# Altium PCB ROS_CAR.PcbDoc (part 9 of 13)
Units mil, origin at the board's own origin, x right, y up, seen from the top; angles counter-clockwise.
Board outline 3937.01 x 3937.01 mil, 2 copper layers (Top Layer, Bottom Layer); 201 components, 155 nets, 998 pads, 0 vias.
Unrouted connection lines stored in the file: 3.
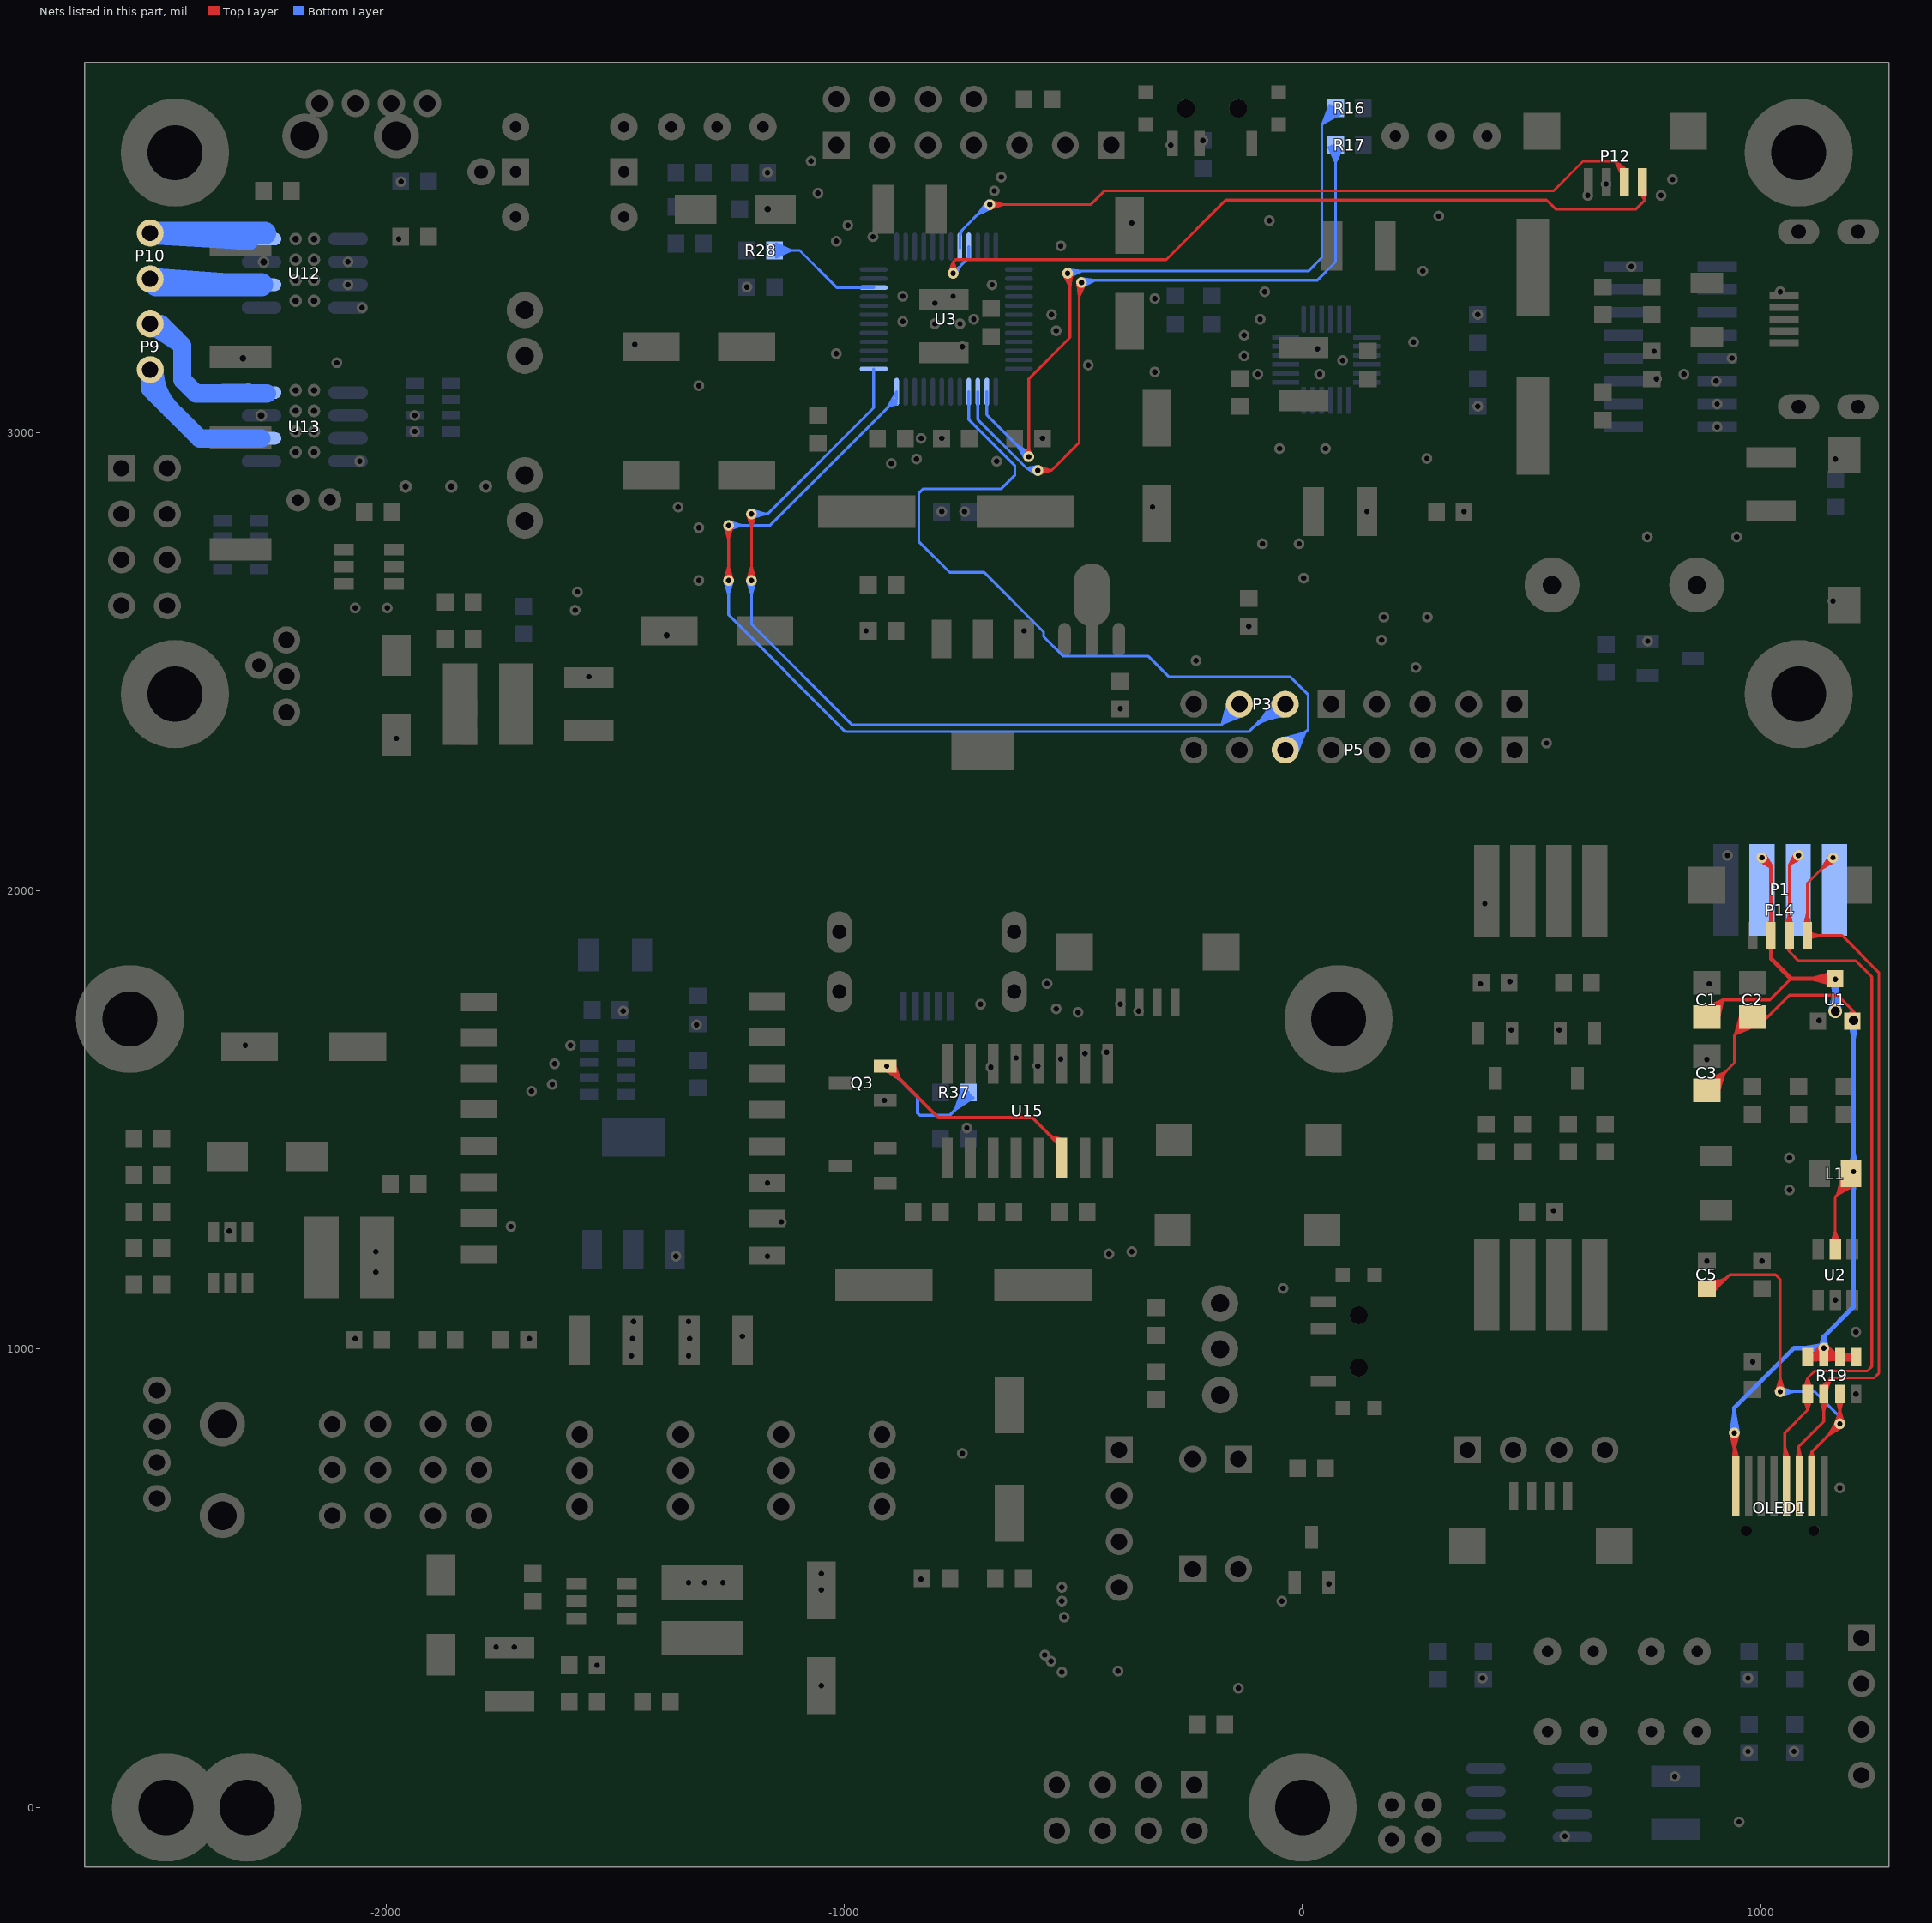
[diagram p9: the nets of this part, all layers, seen from the top]

## Nets (pads, with @x,y where several pads share a name; then routed paths per layer and width w, separated by ;. In a path a pad name is that pad's centre, name@x,y a point inside that pad or via, vN(x,y) a via of type N, cw(c..) or ccw(c..) an arc to the next point about the centre after c; other vN are vias at no path point) (continued)
OLEDVCC_3.3: C2.1 C3.1 L1.1 OLED1.1 pad.1@942.52,817.09 pad.1@1137.52,1002.09 pad.1@1202.52,1387.09 pad.1@1202.52,1717.09 R19.1 R19.2 R19.3 R19.4 U1.2 U2.5 | length 7362
  Top Layer w6: C3.1@873.36,1583.09 920.84,1603 ; C3.1@876.05,1577.61 920.84,1603 ; C3.1@879.34,1572.53 920.84,1603 ; C3.1@882.52,1564.69 942.52,1624.69 942.52,1684.69 C2.1@982.52,1724.69 1015.12,1724.69 ; C3.1@883.18,1567.9 920.84,1603 ; C3.1@886.46,1564.69 920.84,1603 ; C3.1@886.46,1581.28 ccw(c886.46,1611.82) C3.1@908.06,1590.22 ; C3.1@886.46,1587.28 ccw(c886.46,1632.31) 918.3,1600.47 ; C3.1@890.01,1561.77 920.84,1603 ; C3.1@895.02,1558.46 920.84,1603 ; C3.1@897.05,1564.69 cw(c932.12,1564.69) C3.1@907.32,1589.49 ; C3.1@900.43,1555.74 920.84,1603 ; C3.1@903.05,1564.69 cw(c952.6,1564.69) 917.56,1599.73 ; C3.1@906.17,1553.66 920.84,1603 ; C3.1@909.05,1564.69 cw(c973.09,1564.69) 927.8,1609.97 ; 944.49,1686.65 ccw(c915.25,1715.89) C2.1@956.21,1721.58 ; 946.74,1688.9 cw(c978.58,1657.06) C2.1@978.58,1702.09 ; 953.02,1695.18 ccw(c930.23,1717.97) C2.1@962.15,1722.4 ; C2.1@956.98,1699.15 cw(c978.58,1677.55) C2.1@978.58,1708.09 ; C2.1@958.87,1735.72 944.2,1686.37 ; C2.1@961.54,1703.71 ccw(c945.2,1720.05) C2.1@968.09,1723.23 ; C2.1@964.61,1733.63 944.2,1686.37 ; C2.1@970.01,1730.91 944.2,1686.37 ; C2.1@975.03,1727.6 944.2,1686.37 ; C2.1@978.58,1724.69 944.2,1686.37 ; C2.1@981.86,1721.47 944.2,1686.37 ; C2.1@985.7,1716.84 944.2,1686.37 ; C2.1@986.46,1724.69 1015.12,1724.69 ; C2.1@986.82,1720.11 1015.12,1724.69 ; C2.1@986.82,1729.26 1015.12,1724.69 ; C2.1@988.41,1714.28 1015.12,1724.69 ; C2.1@988.41,1735.09 1015.12,1724.69 ; C2.1@988.98,1711.76 944.2,1686.37 ; C2.1@991.26,1708.8 1015.12,1724.69 ; C2.1@991.26,1740.57 1015.12,1724.69 ; C2.1@991.68,1706.28 944.2,1686.37 ; C2.1@995.36,1703.92 1015.12,1724.69 ; C2.1@995.36,1745.45 1015.12,1724.69 ; C2.1@1008.42,1719.41 cw(c1015.12,1717.8) 1015.12,1724.69 ; C2.1@1008.42,1729.96 ccw(c1015.12,1731.57) 1015.12,1724.69 ; R19.1@1102.11,973.29 R19.2@1132.17,976.29 ; R19.1@1102.11,990.89 R19.2@1132.17,987.89 ; R19.1@1103.82,973.37 1132.33,982.09 R19.1@1103.82,990.8 ; R19.1@1105.45,973.78 R19.2@1132.17,987.89 ; R19.1@1105.45,990.39 R19.2@1132.17,976.29 ; R19.1@1108.75,975.86 cw(c1123.79,960.82) 1123.79,982.09 cw(c1123.79,1003.36) R19.1@1108.75,988.32 ; R19.2@1129.04,999.68 R19.2@1136.64,989.03 ; R19.2@1129.13,999.4 R19.2@1137.05,989.07 ; R19.2@1129.44,998.57 R19.2@1138.39,989.03 ; R19.2@1129.75,997.92 R19.2@1139.67,988.75 ; pad.1@1131.52,1008.54 R19.1@1109.52,982.09 ; R19.2@1132.37,994.94 R19.3@1164.64,977.11 ; R19.2@1132.57,977.14 ccw(c1120.62,965.19) 1120.62,982.09 ccw(c1120.62,998.99) R19.2@1132.57,987.04 ; R19.2@1133.36,994.32 R19.3@1165.52,982.09 ; R19.2@1134.56,993.79 R19.3@1165.47,987.45 ; R19.2@1136.64,975.14 R19.1@1109.52,982.09 ; R19.2@1137.05,975.1 R19.3@1165.47,976.72 ; R19.2@1138.39,975.14 R19.3@1165.52,982.09 ; R19.2@1139.67,975.43 R19.3@1165.47,987.45 ; R19.2@1141.68,994.32 R19.1@1109.52,982.09 ; R19.2@1142.47,977.14 cw(c1154.42,965.19) 1154.42,982.09 cw(c1154.42,998.99) R19.2@1142.47,987.04 ; pad.1@1142.66,1009.24 R19.3@1165.47,987.45 ; pad.1@1143.52,1008.54 R19.3@1165.52,982.09 ; pad.1@1144.22,1007.81 R19.3@1164.64,977.11 ; R19.2@1145.6,998.57 R19.2@1136.64,989.03 ; R19.2@1145.7,998.81 R19.2@1137.05,989.07 ; R19.2@1146,999.68 R19.2@1138.39,989.03 ; R19.2@1146.2,1000.58 R19.2@1139.67,988.75 ; U2.5@1152.85,1227.62 1162.52,1256.86 ; U2.5@1155.59,1232.99 ccw(c1138.87,1249.71) 1162.52,1249.71 ccw(c1186.17,1249.71) U2.5@1169.45,1232.99 ; U2.5@1158.73,1226.3 1162.52,1256.86 ; U2.5@1162.52,1226.06 1162.52,1256.86 ; U2.5@1162.52,1227.09 1162.52,1332.09 L1.1@1196.97,1366.54 ; U2.5@1166.31,1226.3 1162.52,1256.86 ; R19.3@1167.57,977.14 ccw(c1155.62,965.19) 1155.62,982.09 ccw(c1155.62,998.99) R19.3@1167.57,987.04 ; R19.3@1171.64,975.14 1144.52,982.09 R19.3@1171.64,989.03 ; R19.3@1171.68,975.14 R19.4@1200.14,975.23 ; R19.3@1171.68,989.04 R19.4@1200.15,988.94 ; U2.5@1172.19,1227.62 1162.52,1256.86 ; R19.3@1173.39,975.14 1200.52,982.09 R19.3@1173.39,989.03 ; R19.3@1175.03,975.55 R19.4@1200.15,988.94 ; R19.3@1175.03,988.62 R19.4@1200.14,975.23 ; 1175.04,1344.61 ccw(c1153.09,1366.56) L1.1@1183.44,1373.08 ; R19.3@1177.47,977.14 cw(c1189.42,965.19) 1189.42,982.09 cw(c1189.42,998.99) R19.3@1177.47,987.04 ; L1.1@1177.58,1371.82 cw(c1140.25,1363.81) 1167.25,1336.81 ; L1.1@1179.07,1384.54 1167.26,1336.83 ; 1179.24,1348.81 cw(c1196.97,1331.08) L1.1@1196.97,1356.15 ; 1182.84,1352.4 ccw(c1165.92,1369.32) L1.1@1189.31,1374.34 ; L1.1@1184.88,1382.71 1167.26,1336.83 ; U1.2@1185.99,1721.55 1199.92,1739.68 ; U1.2@1191.36,1718.47 1199.92,1739.68 ; U1.2@1193.82,1730.2 ccw(c1189.51,1739.68) 1199.92,1739.68 ; L1.1@1194.57,1390.89 L1.1@1184.38,1359.39 ; L1.1@1195.16,1391.93 L1.1@1180.32,1361.35 ; L1.1@1195.98,1392.99 L1.1@1190.37,1380.21 ; U1.2@1196.29,1723.32 ccw(c1187.52,1732.09) U1.2@1199.92,1732.09 ; L1.1@1196.97,1375.98 1167.26,1336.83 ; U1.2@1199.92,1715.83 1199.92,1739.68 ; U1.2@1199.92,1716.81 1199.92,1739.68 ; R19.4@1201.29,975.86 ccw(c1186.25,960.82) 1186.25,982.09 ccw(c1186.25,1003.36) R19.4@1201.29,988.32 ; L1.1@1202.81,1370.77 1167.26,1336.83 ; L1.1@1204.22,1378.44 L1.1@1190.37,1380.21 ; U1.2@1206.02,1730.2 cw(c1210.34,1739.68) 1199.92,1739.68 ; R19.4@1206.22,973.37 1177.71,982.09 R19.4@1206.22,990.8 ; L1.1@1206.7,1366.15 1167.26,1336.83 ; R19.4@1207.52,982.09 R19.1@1102.52,982.09 ; U1.2@1207.75,1724.18 cw(c1219.19,1739.68) 1199.92,1739.68 ; L1.1@1208.39,1380.52 L1.1@1180.32,1361.35 ; U1.2@1208.48,1718.47 1199.92,1739.68 ; L1.1@1209.18,1381.32 L1.1@1184.38,1359.39 ; L1.1@1210.03,1361.05 1167.26,1336.83 ; U1.2@1213.86,1721.55 1199.92,1739.68 ; 1015.12,1724.69 1062.52,1772.09 1167.52,1772.09 1199.92,1739.68 ; R19.1@1102.52,982.09 R19.2@1132.17,987.89 ; R19.1@1102.52,982.09 R19.2@1132.17,976.29 ; R19.1@1109.52,982.09 pad.1@1137.52,1002.09 ; R19.1@1109.52,982.09 R19.2@1136.64,989.03 ; R19.2@1136.64,989.03 pad.1@1137.52,1002.09 ; R19.2@1137.05,989.07 pad.1@1137.52,1002.09 ; R19.2@1137.05,989.07 R19.3@1165.47,987.45 ; pad.1@1137.52,1002.09 R19.2@1139.67,988.75 ; pad.1@1137.52,1002.09 R19.3@1164.64,977.11 ; pad.1@1137.52,1002.09 R19.2@1138.39,989.03 ; pad.1@1137.52,1002.09 R19.3@1165.52,982.09 ; pad.1@1137.52,1002.09 R19.3@1165.47,987.45 ; R19.2@1138.39,989.03 R19.3@1165.52,982.09 ; R19.2@1139.67,988.75 R19.3@1165.47,976.72 ; R19.3@1165.47,976.72 R19.2@1137.52,982.09 R19.3@1165.47,987.45 ; 1167.26,1336.83 L1.1@1190.37,1380.21 ; L1.1@1180.32,1361.35 pad.1@1202.52,1387.09 ; L1.1@1184.38,1359.39 pad.1@1202.52,1387.09 ; L1.1@1190.37,1380.21 pad.1@1202.52,1387.09 ; U1.2@1193.74,1717.79 1199.92,1739.68 ; U1.2@1193.74,1717.79 1199.92,1739.68 ; U1.2@1193.74,1717.79 1199.92,1739.68 ; U1.2@1193.74,1717.79 1199.92,1739.68 ; U1.2@1193.74,1717.79 1199.92,1739.68 ; 1199.92,1739.68 pad.1@1202.52,1717.09 ; 1199.92,1739.68 U1.2@1210.91,1719.77 ; 1199.92,1739.68 pad.1@1202.52,1717.09 ; 1199.92,1739.68 U1.2@1210.91,1719.77 ; 1199.92,1739.68 pad.1@1202.52,1717.09 ; 1199.92,1739.68 U1.2@1210.91,1719.77 ; 1199.92,1739.68 pad.1@1202.52,1717.09 ; 1199.92,1739.68 U1.2@1210.91,1719.77 ; 1199.92,1739.68 pad.1@1202.52,1717.09 ; 1199.92,1739.68 U1.2@1210.91,1719.77 ; R19.4@1200.14,975.23 R19.3@1172.52,982.09 R19.4@1200.15,988.94
  Top Layer w7: pad.1@934.28,816.03 942.52,784.28 ; pad.1@936.64,811.21 cw(c922.46,797.02) 942.52,797.02 cw(c962.58,797.02) pad.1@948.4,811.21 ; OLED1.1@941.69,759.95 942.52,789.06 ; 942.52,779.27 ccw(c965.18,779.27) OLED1.1@949.16,763.25 ; OLED1.1@946.06,760.16 942.52,789.06 ; OLED1.1@947.52,717.09 942.52,722.09 pad.1@942.52,817.09 942.52,784.28 ; OLED1.1@950.35,761.01 942.52,789.06 ; pad.1@950.76,816.03 942.52,784.28
  Bottom Layer w10: pad.1@935.73,817.64 942.52,858.9 ; pad.1@937.7,821.9 ccw(c926.08,833.53) 942.52,833.53 ccw(c958.96,833.53) pad.1@947.34,821.9 ; pad.1@942.52,807.09 942.52,872.09 1072.52,1002.09 pad.1@1137.52,1002.09 1137.52,1027.09 ; pad.1@942.52,817.09 942.52,858.9 ; pad.1@949.31,817.64 942.52,858.9 ; pad.1@1130.77,1003.01 1137.52,1027.09 ; pad.1@1132.7,997.27 ccw(c1121.08,985.64) 1121.08,1002.09 ccw(c1121.08,1018.53) 1132.7,1006.9 ccw(c1121.08,1018.53) 1137.52,1018.53 ccw(c1153.96,1018.53) pad.1@1142.34,1006.9 ; pad.1@1136.96,995.3 1095.71,1002.09 pad.1@1136.96,1008.88 ; pad.1@1137.52,992.09 1137.52,1027.09 ; pad.1@1144.27,1003.01 1137.52,1027.09 ; pad.1@1195.73,1386.53 1202.52,1345.28 pad.1@1209.31,1386.53 ; pad.1@1195.73,1387.64 1202.52,1428.9 pad.1@1209.31,1387.64 ; pad.1@1195.73,1716.53 1202.52,1675.28 pad.1@1209.31,1716.53 ; pad.1@1197.7,1382.27 cw(c1186.08,1370.64) 1202.52,1370.64 cw(c1218.96,1370.64) pad.1@1207.34,1382.27 ; pad.1@1197.7,1391.9 ccw(c1186.08,1403.53) 1202.52,1403.53 ccw(c1218.96,1403.53) pad.1@1207.34,1391.9 ; pad.1@1197.7,1712.27 cw(c1186.08,1700.64) 1202.52,1700.64 cw(c1218.96,1700.64) pad.1@1207.34,1712.27 ; pad.1@1202.52,1717.09 1202.52,1092.09 1137.52,1027.09
OLEDVCC_5: C1.1 P1.3 P14.3 pad.1@1002.52,2072.09 pad.1@1162.52,1737.09 pad.1@1162.52,1807.09 U1.1 | length 2466.1
  Top Layer w6: C1.1@872.91,1742.76 917.52,1762.09 ; C1.1@875.69,1737.31 917.52,1762.09 ; C1.1@879.1,1732.3 917.52,1762.09 ; C1.1@882.52,1724.69 882.52,1727.09 917.52,1762.09 ; C1.1@883.07,1727.78 917.52,1762.09 ; C1.1@886.46,1724.69 917.52,1762.09 ; C1.1@886.46,1741.28 ccw(c886.46,1766.03) C1.1@903.96,1748.52 ; C1.1@886.46,1747.28 ccw(c886.46,1786.51) 914.2,1758.77 ; C1.1@890.12,1721.92 917.52,1762.09 ; C1.1@895.29,1718.85 917.52,1762.09 ; C1.1@896.76,1727.15 cw(c917.22,1732.03) C1.1@902.35,1746.91 ; C1.1@900.84,1716.42 917.52,1762.09 ; C1.1@902.59,1728.54 cw(c929.47,1734.96) 909.93,1754.5 ; C1.1@906.71,1714.68 917.52,1762.09 ; C1.1@908.43,1729.93 cw(c941.72,1737.88) 917.52,1762.09 ; 1066.26,1808.35 1020,1762.09 917.52,1762.09
  Top Layer w10: pad.1@998.31,2066.73 1022.83,2051.77 ; pad.1@1002.52,2065.28 cw(c1002.52,2048.83) 1014.15,2060.46 cw(c1025.77,2072.09) pad.1@1009.33,2072.09 ; pad.1@1002.52,2072.09 1022.83,2051.77 ; pad.1@1007.87,2076.3 1022.83,2051.77 ; P14.3@1019.41,1878.51 cw(c1011.14,1870.24) 1022.83,1870.24 cw(c1034.53,1870.24) P14.3@1026.26,1878.51 ; P14.3@1019.41,1925.67 ccw(c1011.14,1933.93) 1022.83,1933.93 ccw(c1034.53,1933.93) P14.3@1026.26,1925.67 ; P14.3@1022.83,1881.93 1022.83,1851.77 ; P14.3@1022.83,1922.24 1022.83,1962.09 ; 1143.03,1808.35 cw(c1143.03,1787.6) U1.1@1157.7,1802.27 ; U1.1@1149.12,1808.35 ccw(c1149.12,1820.49) U1.1@1157.7,1811.9 ; U1.1@1153.53,1799.35 ccw(c1131.82,1777.65) 1131.82,1808.35 ccw(c1131.82,1839.05) U1.1@1153.53,1817.34 ; U1.1@1155.76,1807.93 U1.1@1160.82,1820.95 ; U1.1@1160.82,1795.74 1114.8,1808.35 ; U1.1@1161.85,1800.31 1114.8,1808.35 ; U1.1@1161.91,1800.3 1117.01,1807.74 ; U1.1@1162.11,1813.89 1117.01,1807.74 ; U1.1@1162.21,1813.89 1114.8,1808.35 ; U1.1@1168.87,1809.54 U1.1@1160.82,1820.95 ; 1022.83,1851.77 1066.26,1808.35 U1.1@1162.52,1808.35 1114.8,1808.35 ; 1022.83,1851.77 1022.83,2051.77 ; 1114.8,1808.35 pad.1@1162.52,1807.09 ; 1114.8,1808.35 U1.1@1160.82,1820.95 ; 1117.01,1807.74 pad.1@1162.52,1807.09 ; 1120.67,1808.35 pad.1@1162.52,1807.09 ; 1120.67,1808.35 1162.17,1813.89 1120.66,1808.35 ; 1120.67,1808.35 1161.76,1800.32 1120.66,1808.35 ; 1120.66,1808.35 pad.1@1162.52,1807.09 ; U1.1@1160.82,1820.95 pad.1@1162.52,1807.09
  Bottom Layer w10: pad.1@1152.58,1738.2 1162.52,1782.09 pad.1@1172.46,1738.2 ; pad.1@1155.45,1744.16 ccw(c1138.38,1761.23) 1162.52,1761.23 ccw(c1186.66,1761.23) pad.1@1169.59,1744.16 ; pad.1@1155.73,1806.53 1162.52,1765.28 pad.1@1169.31,1806.53 ; pad.1@1157.7,1802.27 cw(c1146.08,1790.64) 1162.52,1790.64 cw(c1178.96,1790.64) pad.1@1167.34,1802.27 ; pad.1@1162.52,1737.09 pad.1@1162.52,1807.09
ORES: C5.2 OLED1.7 pad.1@1042.52,907.09 pad.1@1172.52,837.09 R19.6 | length 2183.3
  Top Layer w6: C5.2@879.09,1146.43 921.72,1151.29 ; C5.2@880.19,1140.47 921.72,1151.29 ; C5.2@882.11,1134.77 921.72,1151.29 ; C5.2@882.52,1131.77 902.2,1131.77 ; C5.2@883.09,1129.11 ccw(c887.48,1157.08) 907.49,1137.06 ; C5.2@884.02,1135.04 ccw(c889.74,1171.5) 915.84,1145.4 ; C5.2@884.95,1140.97 ccw(c892,1185.92) 924.18,1153.74 ; C5.2@885.12,1128.89 921.72,1151.29 ; C5.2@885.88,1146.89 ccw(c894.26,1200.34) 932.52,1162.08 ; C5.2@888.61,1123.99 921.72,1151.29 ; C5.2@892.79,1119.6 921.72,1151.29 ; C5.2@898.51,1128.75 cw(c902.2,1128) 902.2,1131.77 ; C5.2@898.51,1134.8 ccw(c902.2,1135.54) 902.2,1131.77 ; pad.1@1033.81,908.39 1042.52,936.9 pad.1@1051.23,908.39 ; pad.1@1036.29,913.32 ccw(c1021.25,928.36) 1042.52,928.36 ccw(c1063.79,928.36) pad.1@1048.75,913.32 ; pad.1@1042.52,907.09 1042.52,1152.09 1032.52,1162.09 932.52,1162.09 ; OLED1.7@1106.6,760.91 1111.42,775.98 ; OLED1.7@1107.97,763.6 ccw(c1099.65,771.92) 1111.42,771.92 ccw(c1123.18,771.92) OLED1.7@1114.86,763.6 ; OLED1.7@1111.42,702.09 1111.42,775.98 ; OLED1.7@1111.42,760.16 1111.42,775.98 ; OLED1.7@1116.23,760.91 1111.42,775.98 ; pad.1@1163.71,837.09 cw(c1142.44,837.09) 1157.48,822.04 cw(c1172.52,807) pad.1@1172.52,828.27 ; pad.1@1163.8,838.39 1172.52,866.9 pad.1@1181.23,838.39 ; pad.1@1165.55,842.47 1147.98,812.55 ; R19.6@1165.57,891.21 1172.52,864.09 ; pad.1@1166.29,843.32 ccw(c1151.25,858.36) 1172.52,858.36 ccw(c1193.79,858.36) pad.1@1178.75,843.32 ; R19.6@1167.57,887.14 cw(c1155.62,875.19) 1172.52,875.19 cw(c1189.42,875.19) R19.6@1177.47,887.14 ; R19.6@1172.52,892.09 1172.52,864.09 ; R19.6@1172.52,902.09 pad.1@1172.52,837.09 ; pad.1@1177.91,830.11 1147.98,812.55 ; R19.6@1179.46,891.21 1172.52,864.09 ; C5.2@883.5,1131.77 902.2,1131.77 ; C5.2@883.5,1131.77 921.72,1151.29 ; C5.2@883.5,1131.77 902.2,1131.77 ; 902.2,1131.77 883.8,1128.48 902.2,1131.77 ; 902.2,1131.77 883.8,1135.07 902.2,1131.77 ; 902.2,1131.77 885.82,1122.76 902.2,1131.77 ; 902.2,1131.77 885.82,1140.79 902.2,1131.77 ; 902.2,1131.77 889.77,1117.81 902.2,1131.77 ; 902.2,1131.77 889.77,1145.74 902.2,1131.77 ; 902.2,1131.77 932.52,1162.09 ; 1111.42,775.98 pad.1@1172.52,837.09 ; 1147.98,812.55 pad.1@1172.52,837.09
  Bottom Layer w6: pad.1@1042.52,907.09 1117.52,907.09 1172.52,852.09 ; pad.1@1043.82,898.37 1072.33,907.09 pad.1@1043.82,915.8 ; pad.1@1048.75,900.86 cw(c1063.79,885.82) 1063.79,907.09 cw(c1063.79,928.36) pad.1@1048.75,913.32 ; pad.1@1164.1,839.67 1172.52,852.09 ; pad.1@1168.23,844.78 ccw(c1164.15,852.09) 1172.52,852.09 ; pad.1@1172.52,837.09 1172.52,852.09 ; pad.1@1176.81,844.78 cw(c1180.88,852.09) 1172.52,852.09 ; pad.1@1180.94,839.67 1172.52,852.09
OSCL: OLED1.6 P1.1 P14.1 pad.1@1157.52,2072.09 R19.7 | length 2257.4
  Top Layer w6: OLED1.6@1078.99,760.36 1082.52,786.03 ; OLED1.6@1080.41,763.6 ccw(c1075.32,768.69) 1082.52,768.69 ; OLED1.6@1082.52,742.09 1082.52,787.09 1137.52,842.09 1137.52,922.09 1152.52,937.09 ; 1082.52,775.16 ccw(c1098.86,775.16) OLED1.6@1087.3,763.6 ; OLED1.6@1083.86,760.16 1082.52,786.03 ; OLED1.6@1088.68,760.87 1082.52,786.03 ; P14.1@1094.78,1923.08 1101.57,1950.09 ; P14.1@1096.74,1927.08 ccw(c1085.06,1938.76) 1101.57,1938.76 ccw(c1118.09,1938.76) P14.1@1106.41,1927.08 ; P14.1@1101.57,1922.24 1101.57,1950.09 ; P14.1@1102.42,1895.3 1129.42,1902.09 P14.1@1102.42,1908.88 ; P14.1@1106.41,1897.25 cw(c1118.09,1885.57) 1118.09,1902.09 cw(c1118.09,1918.61) P14.1@1106.41,1906.93 ; P14.1@1108.37,1923.08 1101.57,1950.09 ; R19.7@1130.57,891.21 1137.52,864.09 ; R19.7@1131.99,916.38 1152.52,937.09 ; R19.7@1132.57,887.14 cw(c1120.62,875.19) 1137.52,875.19 cw(c1154.42,875.19) R19.7@1142.47,887.14 ; R19.7@1137.52,892.09 1137.52,864.09 ; R19.7@1137.52,912.09 1152.52,937.09 ; R19.7@1138.51,912.23 cw(c1157.67,914.88) 1143.99,928.56 ; R19.7@1143.91,909.23 1152.52,937.09 ; R19.7@1144.46,891.21 1137.52,864.09 ; R19.7@1144.45,913.05 cw(c1172.64,916.96) 1152.52,937.09 ; pad.1@1148.71,2072.09 cw(c1127.44,2072.09) 1142.48,2057.05 cw(c1157.52,2042) pad.1@1157.52,2063.28 ; pad.1@1150.55,2077.48 1132.98,2047.55 ; pad.1@1162.91,2065.12 1132.98,2047.55 ; 1132.98,2047.55 pad.1@1157.52,2072.09 1101.57,2016.14 P14.1@1101.57,1902.09 1177.52,1902.09 1257.52,1822.09 1257.52,947.09 1247.52,937.09 1152.52,937.09
OSDA: OLED1.5 P1.2 P14.2 pad.1@1082.52,2077.09 R19.8 | length 2246.9
  Top Layer w6: OLED1.5@1051.43,759.91 1052.52,786.11 ; OLED1.5@1052.52,752.09 1052.52,817.09 1102.52,867.09 ; 1052.52,781.05 ccw(c1077.19,781.05) OLED1.5@1059.75,763.6 ; P14.2@1055.41,1923.08 1062.2,1950.09 ; P14.2@1055.55,1880.32 1062.2,1867.4 ; OLED1.5@1056.3,760.16 1052.52,786.11 ; P14.2@1057.37,1927.08 ccw(c1045.69,1938.76) 1062.2,1938.76 ccw(c1078.72,1938.76) P14.2@1067.04,1927.08 ; P14.2@1057.85,1876.65 cw(c1050.21,1867.4) 1062.2,1867.4 ; OLED1.5@1061.04,761.3 1052.52,786.11 ; P14.2@1062.2,1881.93 1062.2,1867.4 ; P14.2@1062.2,1922.24 1062.2,1950.09 ; P14.2@1066.56,1876.65 ccw(c1074.2,1867.4) 1062.2,1867.4 ; P14.2@1068.85,1880.32 1062.2,1867.4 ; P14.2@1069,1923.08 1062.2,1950.09 ; pad.1@1073.71,2077.09 cw(c1052.44,2077.09) 1067.48,2062.05 cw(c1082.52,2047) pad.1@1082.52,2068.28 ; pad.1@1075.41,2082.29 1062.2,2056.77 ; pad.1@1087.72,2069.97 1062.2,2056.77 ; R19.8@1093.83,892.45 1102.52,867.09 ; R19.8@1093.83,911.72 1102.52,937.09 ; R19.8@1096.29,887.67 cw(c1081.25,872.63) 1102.52,872.63 cw(c1123.79,872.63) R19.8@1108.75,887.67 ; R19.8@1096.29,916.51 ccw(c1081.25,931.55) 1102.52,931.55 ccw(c1123.79,931.55) R19.8@1108.75,916.51 ; R19.8@1102.52,893.9 1102.52,867.09 ; R19.8@1102.52,910.28 1102.52,937.09 ; R19.8@1111.21,892.45 1102.52,867.09 ; R19.8@1111.21,911.72 1102.52,937.09 ; 1062.2,1867.4 1082.52,1847.09 1207.52,1847.09 1242.52,1812.09 1242.52,962.09 1232.52,952.09 1117.52,952.09 1102.52,937.09 ; 1062.2,1867.4 1062.2,2056.77 ; 1062.2,2056.77 pad.1@1082.52,2077.09 1062.2,2056.77 ; 1102.52,867.09 1102.52,937.09
OUT2_1: P9.2 U13.8 | length 621.3
  Bottom Layer w40: P9.2@-2515,3227.56 cw(c-2515,3149.24) -2459.62,3204.62 ; U13.8@-2301.5,3087.09 -2415,3085 ; U13.8@-2260,3085 -2415,3085 ; -2445,3190 P9.2@-2515,3237.09 -2492.09,3237.09 -2445,3190 ; -2445,3190 -2445,3115 -2415,3085
OUT2_2: P9.1 U13.6 | length 617.4
  Bottom Layer w40: P9.1@-2505.47,3137.09 ccw(c-2380.86,3137.09) -2468.98,3048.98 ; U13.6@-2301.5,2987.09 -2407.09,2987.09 ; U13.6@-2271.97,2987.09 -2407.09,2987.09 ; -2515,3095 P9.1@-2515,3137.09 ; -2515,3095 P9.1@-2515,3137.09 ; -2515,3095 P9.1@-2515,3137.09 ; -2515,3095 -2407.09,2987.09
OUT3_1: P10.2 U12.8 | length 823.3
  Bottom Layer w50: -2335.5,3424.75 P10.2@-2515,3435 ; -2335.47,3435 P10.2@-2515,3435 ; U12.8@-2301.5,3422.09 -2466.38,3435 P10.2@-2515,3435 ; U12.8@-2265,3435 P10.2@-2515,3435
OUT3_2: P10.1 U12.6 | length 872.2
  Bottom Layer w50: P10.1@-2511.8,3338.2 ccw(c-2472.89,3377.11) -2472.89,3322.09 ; -2333.45,3322.09 P10.1@-2515,3335 ; -2331.97,3322.09 P10.1@-2515,3335 ; U12.6@-2301.5,3322.09 -2465.28,3322.09 P10.1@-2515,3335 ; U12.6@-2271.97,3322.09 -2502.09,3322.09 P10.1@-2515,3335
PA2: P3.2 pad.1@-1252.48,2677.09 pad.1@-1252.48,2797.09 U3.12 | length 3349.3
  Top Layer w6: pad.1@-1261.19,2678.39 -1252.48,2706.9 pad.1@-1243.77,2678.39 ; pad.1@-1261.19,2795.78 -1252.48,2767.28 pad.1@-1243.77,2795.78 ; pad.1@-1258.71,2683.32 ccw(c-1273.75,2698.36) -1252.48,2698.36 ccw(c-1231.21,2698.36) pad.1@-1246.25,2683.32 ; pad.1@-1258.71,2790.86 cw(c-1273.75,2775.82) -1252.48,2775.82 cw(c-1231.21,2775.82) pad.1@-1246.25,2790.86 ; pad.1@-1252.48,2677.09 pad.1@-1252.48,2797.09
  Bottom Layer w6: pad.1@-1261.19,2675.78 -1252.48,2647.28 pad.1@-1243.77,2675.78 ; pad.1@-1258.71,2670.86 cw(c-1273.75,2655.82) -1252.48,2655.82 cw(c-1231.21,2655.82) pad.1@-1246.25,2670.86 ; pad.1@-1252.48,2677.09 -1252.48,2602.09 -997.48,2347.09 -117.48,2347.09 -57.48,2407.09 P3.2@-37.48,2407.09 -87.26,2377.31 ; pad.1@-1252.48,2797.09 -1162.48,2797.09 -885.75,3073.82 U3.12@-885.75,3088.62 -906.12,3053.45 ; pad.1@-1251.18,2788.37 -1222.67,2797.09 pad.1@-1251.18,2805.8 ; pad.1@-1246.25,2790.86 cw(c-1231.21,2775.82) -1231.21,2797.09 cw(c-1231.21,2818.36) pad.1@-1246.25,2803.32 ; -907.44,3052.13 cw(c-885.75,3030.43) U3.12@-885.75,3061.11 ; -897.2,3062.37 cw(c-885.75,3050.92) U3.12@-885.75,3067.11 ; U3.12@-886.96,3072.61 cw(c-885.75,3071.4) U3.12@-885.75,3073.11 ; -116.91,2347.66 cw(c-37.48,2268.23) P3.2@-37.48,2380.56 ; -106.66,2357.9 cw(c-37.48,2288.72) P3.2@-37.48,2386.56 ; -96.42,2368.14 cw(c-37.48,2309.2) P3.2@-37.48,2392.56 ; -86.18,2378.39 cw(c-37.48,2329.69) P3.2@-37.48,2398.56 ; -75.94,2388.63 cw(c-37.48,2350.17) P3.2@-37.48,2404.56 ; -68.62,2395.94 ccw(c-79.77,2407.09) P3.2@-64.01,2407.09 ; P3.2@-55.94,2426.13 -87.26,2377.31 ; P3.2@-50.97,2422.56 -87.26,2377.31 ; P3.2@-46.44,2418.52 -87.26,2377.31 ; P3.2@-42.38,2414.06 -87.26,2377.31 ; P3.2@-33.65,2399.47 -87.26,2377.31 ; P3.2@-31.64,2393.78 -87.26,2377.31 ; P3.2@-30.23,2387.88 -87.26,2377.31 ; P3.2@-29.43,2381.81 -87.26,2377.31
PA3: P3.3 pad.1@-1202.48,2677.09 pad.1@-1202.48,2822.09 U3.13 | length 2987.6
  Top Layer w6: pad.1@-1211.19,2678.39 -1202.48,2706.9 pad.1@-1193.77,2678.39 ; pad.1@-1211.19,2820.78 -1202.48,2792.28 ; pad.1@-1208.71,2683.32 ccw(c-1223.75,2698.36) -1202.48,2698.36 ccw(c-1181.21,2698.36) pad.1@-1196.25,2683.32 ; pad.1@-1208.71,2815.86 cw(c-1223.75,2800.82) -1202.48,2800.82 cw(c-1181.21,2800.82) pad.1@-1196.25,2815.86 ; pad.1@-1202.48,2677.09 pad.1@-1202.48,2822.09 -1202.48,2792.28 ; pad.1@-1193.77,2820.78 -1202.48,2792.28
  Bottom Layer w6: pad.1@-1211.19,2675.78 -1202.48,2647.28 pad.1@-1193.77,2675.78 ; pad.1@-1208.71,2670.86 cw(c-1223.75,2655.82) -1202.48,2655.82 cw(c-1181.21,2655.82) pad.1@-1196.25,2670.86 ; pad.1@-1202.48,2677.09 -1202.48,2582.09 -982.48,2362.09 -177.48,2362.09 P3.3@-127.48,2412.09 ; pad.1@-1202.48,2822.09 -1167.48,2822.09 -935.94,3053.62 U3.13@-935.94,3138.82 -935.94,3115.9 ; pad.1@-1201.18,2813.37 -1172.67,2822.09 pad.1@-1201.18,2830.8 ; pad.1@-1196.25,2815.86 cw(c-1181.21,2800.82) -1181.21,2822.09 cw(c-1181.21,2843.36) pad.1@-1196.25,2828.32 ; -174.98,2364.59 ccw(c-204.48,2394.09) P3.3@-163.52,2402.03 ; -174.23,2365.34 cw(c-137.48,2328.59) P3.3@-137.48,2380.56 ; -167,2372.57 ccw(c-191.11,2396.68) P3.3@-157.63,2403.18 ; -163.99,2375.58 cw(c-137.48,2349.07) P3.3@-137.48,2386.56 ; P3.3@-160.87,2419.6 -175.61,2363.96 ; -159.01,2380.55 ccw(c-177.74,2399.28) P3.3@-151.74,2404.32 ; P3.3@-155.04,2417.72 -175.61,2363.96 ; P3.3@-149.49,2415.26 -175.61,2363.96 ; P3.3@-144.27,2412.25 -175.61,2363.96 ; P3.3@-137.48,2407.09 -175.61,2363.96 ; P3.3@-131.53,2400.98 -175.61,2363.96 ; P3.3@-127.9,2396.17 -175.61,2363.96 ; P3.3@-124.77,2390.97 -175.61,2363.96 ; P3.3@-122.19,2385.41 -175.61,2363.96
PA11: P12.2 pad.1@-682.48,3497.09 U3.32 | length 1933.2
  Top Layer w6: pad.1@-682.48,3497.09 -462.48,3497.09 -432.48,3527.09 547.52,3527.09 612.2,3591.77 682.84,3591.77 ; pad.1@-681.18,3488.37 -652.67,3497.09 pad.1@-681.18,3505.8 ; pad.1@-676.25,3490.86 cw(c-661.21,3475.82) -661.21,3497.09 cw(c-661.21,3518.36) pad.1@-676.25,3503.32 ; 686.88,3587.73 cw(c666.4,3567.24) P12.2@695.36,3567.24 ; P12.2@696.4,3563.62 682.84,3591.77 ; 697.12,3577.49 cw(c686.88,3567.24) P12.2@701.36,3567.24 ; P12.2@702.21,3567.24 682.84,3591.77 ; P12.2@702.52,3572.09 682.84,3591.77 ; P12.2@707.08,3572.05 682.84,3591.77
  Bottom Layer w6: U3.32@-747.48,3402.09 -747.48,3437.09 pad.1@-692.48,3492.09 ; U3.32@-746.03,3431.14 cw(c-728.18,3431.14) -740.8,3443.76 ; -706.06,3478.51 cw(c-682.48,3454.93) pad.1@-682.48,3488.28 ; -695.81,3488.75 cw(c-682.48,3475.42) pad.1@-682.48,3494.28 ; -693.99,3490.58 ccw(c-700.49,3497.09) pad.1@-691.29,3497.09 ; pad.1@-688.86,3503.16 -709.57,3474.99 ; pad.1@-682.48,3497.09 -709.57,3474.99 ; pad.1@-677.82,3489.61 -709.57,3474.99
PA12: P12.1 pad.1@-762.48,3347.09 U3.33 | length 1926
  Top Layer w6: pad.1@-771.15,3348.64 -762.48,3372.09 ; pad.1@-768.71,3353.32 ccw(c-783.75,3368.36) -762.48,3368.36 ccw(c-741.21,3368.36) pad.1@-756.25,3353.32 ; pad.1@-762.48,3347.09 -762.48,3372.09 ; pad.1@-753.81,3348.64 -762.48,3372.09 ; P12.1@735.44,3523.91 747.52,3507.09 ; P12.1@738.51,3520.81 cw(c731.19,3506.22) 747.52,3506.22 ; P12.1@741.2,3526.18 cw(c736.06,3515.94) 747.52,3515.94 ; P12.1@741.58,3526.93 747.52,3507.09 ; P12.1@747.52,3537.09 747.52,3507.09 ; P12.1@748.36,3527.78 747.52,3507.09 ; -762.48,3372.09 -757.48,3377.09 -297.48,3377.09 -167.48,3507.09 532.52,3507.09 552.52,3487.09 727.52,3487.09 747.52,3507.09
  Bottom Layer w6: pad.1@-762.48,3347.09 -728.27,3381.3 U3.33@-728.27,3405.55 ; pad.1@-762.48,3355.9 ccw(c-762.48,3377.17) -747.44,3362.13 ccw(c-732.4,3347.09) pad.1@-753.67,3347.09 ; -733.83,3375.73 cw(c-728.27,3370.17) U3.33@-728.27,3378.04
PC13: pad.1@-512.48,3347.09 pad.1@-597.48,2947.09 R16.1 U3.2 | length 2385
  Top Layer w6: pad.1@-603.71,2953.32 ccw(c-618.75,2968.36) -597.48,2968.36 ccw(c-576.21,2968.36) pad.1@-591.25,2953.32 ; pad.1@-597.48,2947.09 -597.48,3117.09 -507.48,3207.09 pad.1@-507.48,3347.09 ; pad.1@-520.89,3344.45 -507.48,3316.42 ; pad.1@-518.71,3340.86 cw(c-545.82,3313.74) -507.48,3313.74 ; pad.1@-514.47,3345.1 cw(c-531.34,3328.23) -507.48,3328.23 ; pad.1@-512.48,3347.09 -507.48,3316.42 ; pad.1@-503.67,3347.26 -507.48,3316.42
  Bottom Layer w6: -688.9,3040.11 U3.2@-688.9,3063.03 ; U3.2@-688.9,3088.62 -688.9,3038.5 pad.1@-592.48,2942.09 ; pad.1@-606.29,2947.09 ccw(c-627.56,2947.09) -612.52,2962.13 ccw(c-597.48,2977.17) pad.1@-597.48,2955.9 ; pad.1@-604.45,2941.7 -622.02,2971.63 ; pad.1@-597.48,2947.09 -622.02,2971.63 ; pad.1@-592.09,2954.06 -622.02,2971.63 ; pad.1@-512.65,3355.9 -481.7,3352.09 ; pad.1@-512.48,3347.09 -481.7,3352.09 ; pad.1@-512.48,3352.09 12.52,3352.09 42.52,3382.09 42.52,3672.09 72.2,3701.77 R16.1@72.2,3707.09 ; pad.1@-510.49,3345.1 cw(c-493.62,3328.23) -493.62,3352.09 ; pad.1@-509.85,3338.68 -481.7,3352.09 ; pad.1@-506.25,3340.86 cw(c-479.14,3313.74) -479.14,3352.09 ; 44.69,3674.25 ccw(c15.1,3703.84) R16.1@56.91,3705.5 ; 53.47,3683.03 cw(c72.2,3664.3) R16.1@72.2,3690.8 ; 54.38,3683.95 ccw(c33.75,3704.58) R16.1@62.9,3705.73 ; R16.1@59.02,3713.88 44.26,3673.83 ; R16.1@64.55,3711.39 44.26,3673.83 ; R16.1@69.62,3708.17 44.26,3673.83 ; R16.1@72.2,3706.1 44.26,3673.83 ; R16.1@74.62,3703.84 44.26,3673.83 ; R16.1@78.53,3699.28 44.26,3673.83 ; R16.1@81.79,3694.17 44.26,3673.83
PC14: pad.1@-482.48,3327.09 pad.1@-577.48,2917.09 R17.1 U3.3 | length 2383.5
  Top Layer w6: pad.1@-577.48,2917.09 -547.48,2917.09 -487.48,2977.09 pad.1@-487.48,3327.09 ; pad.1@-576.18,2908.37 -547.67,2917.09 pad.1@-576.18,2925.8 ; pad.1@-571.25,2910.86 cw(c-556.21,2895.82) -556.21,2917.09 cw(c-556.21,2938.36) pad.1@-571.25,2923.32 ; pad.1@-491.29,3327.26 -487.48,3296.33 ; -487.48,3293.74 cw(c-449.14,3293.74) pad.1@-476.25,3320.86 ; -487.48,3308.23 cw(c-463.62,3308.23) pad.1@-480.49,3325.1 ; pad.1@-482.48,3327.09 -487.48,3296.33 ; pad.1@-474.07,3324.46 -487.48,3296.33
  Bottom Layer w6: -708.58,3040.11 U3.3@-708.58,3063.03 ; U3.3@-708.58,3088.62 -708.58,3028.19 -602.48,2922.09 ; -591.62,2922.09 cw(c-591.62,2908.2) pad.1@-579.86,2915.59 ; pad.1@-587.48,2922.09 -602.48,2922.09 ; pad.1@-584.94,2912.4 ccw(c-602.48,2901.37) -602.48,2922.09 ; pad.1@-580.68,2908.88 -602.48,2922.09 ; pad.1@-577.48,2917.09 -602.48,2922.09 ; pad.1@-577.27,2925.9 -602.48,2922.09 ; pad.1@-487.48,3327.09 -482.48,3332.09 32.52,3332.09 72.2,3371.77 R17.1@72.2,3627.09 ; pad.1@-482.65,3335.9 -451.7,3332.09 ; pad.1@-482.48,3327.09 -451.7,3332.09 ; pad.1@-480.49,3325.1 cw(c-463.62,3308.23) -463.62,3332.09 ; pad.1@-479.85,3318.68 -451.7,3332.09 ; pad.1@-476.25,3320.86 cw(c-449.14,3293.74) -449.14,3332.09 ; R17.1@57.24,3622.88 72.2,3589.8 ; R17.1@61.38,3615.28 cw(c35.25,3589.15) 72.2,3589.15 cw(c109.16,3589.15) R17.1@83.03,3615.28 ; R17.1@62.97,3624.91 72.2,3589.8 ; R17.1@65.62,3619.52 cw(c49.74,3603.63) 72.2,3603.63 cw(c94.67,3603.63) R17.1@78.79,3619.52 ; R17.1@68.9,3625.95 72.2,3589.8 ; R17.1@72.2,3626.1 72.2,3589.8 ; R17.1@75.51,3625.95 72.2,3589.8 ; R17.1@81.44,3624.91 72.2,3589.8 ; R17.1@87.17,3622.88 72.2,3589.8
PC15: P5.6 U3.4 | length 2424.8
  Bottom Layer w6: -728.27,3040.11 U3.4@-728.27,3063.03 ; U3.4@-728.27,3088.62 -728.27,3027.87 -627.48,2927.09 -627.48,2907.09 -657.48,2877.09 -827.48,2877.09 -837.48,2867.09 -837.48,2762.48 -770,2695 -695,2695 -565,2565 -565,2554.61 -522.48,2512.09 -337.48,2512.09 -292.48,2467.09 -27.48,2467.09 12.52,2427.09 12.52,2352.09 ; P5.6@-50.03,2330.46 5.82,2345.39 ; P5.6@-48.14,2324.63 5.82,2345.39 ; P5.6@-45.66,2319.09 5.82,2345.39 ; P5.6@-42.64,2313.87 5.82,2345.39 ; P5.6@-37.48,2307.09 5.82,2345.39 ; P5.6@-36.66,2321.59 ccw(c-34.44,2361.12) -6.44,2333.13 ; P5.6@-36.33,2327.58 ccw(c-33.43,2379.07) 3.04,2342.6 ; P5.6@-35.99,2333.57 ccw(c-32.42,2397.02) 12.52,2352.08 ; P5.6@-31.37,2301.13 5.82,2345.39 ; P5.6@-27.48,2312.09 12.52,2352.09 ; P5.6@-26.56,2297.5 5.82,2345.39 ; P5.6@-21.37,2294.37 5.82,2345.39 ; P5.6@-16.95,2307.09 cw(c20.53,2307.09) -5.97,2333.59 ; P5.6@-15.82,2291.78 5.82,2345.39 ; P5.6@-10.95,2307.09 cw(c41.02,2307.09) 4.27,2343.84
RST: pad.1@-907.5,1617.5 Q3.2 R37.1 U15.14 | length 8560
  Top Layer w7: Q3.2@-910.79,1617.4 -907.4,1617.4 -795,1505 -590,1505 U15.14@-525,1440 ; Q3.2@-907.5,1609.19 cw(c-907.5,1589.12) -893.31,1603.31 cw(c-879.12,1617.5) Q3.2@-899.19,1617.5 ; -554.78,1469.78 ccw(c-525,1499.56) U15.14@-525,1457.45 ; -542.83,1457.83 ccw(c-525,1475.66) U15.14@-525,1450.44 ; U15.14@-530.38,1442.8 -549.38,1464.38 ; U15.14@-525,1449.13 -549.38,1464.38 ; U15.14@-521.66,1456.74 -549.38,1464.38 ; Q3.2@-912.71,1611.03 -880.38,1590.33 ; Q3.2@-912.71,1611.03 -880.38,1590.33 ; Q3.2@-912.71,1611.03 -880.38,1590.33 ; Q3.2@-912.71,1611.03 -880.38,1590.33 ; Q3.2@-912.71,1611.03 -880.38,1590.33 ; Q3.2@-912.71,1611.03 -880.38,1590.33 ; Q3.2@-912.71,1611.03 -880.38,1590.33 ; Q3.2@-912.71,1611.03 -880.38,1590.33 ; Q3.2@-912.71,1611.03 -880.38,1590.33 ; Q3.2@-912.71,1611.03 -880.38,1590.33 ; Q3.2@-912.71,1611.03 -880.38,1590.33 ; Q3.2@-912.71,1611.03 -880.38,1590.33 ; Q3.2@-912.71,1611.03 -880.38,1590.33 ; Q3.2@-912.71,1611.03 -880.38,1590.33 ; Q3.2@-912.71,1611.03 -880.38,1590.33 ; Q3.2@-912.71,1611.03 -880.38,1590.33 ; Q3.2@-912.71,1611.03 -880.38,1590.33 ; Q3.2@-912.71,1611.03 -880.38,1590.33 ; Q3.2@-912.71,1611.03 -880.38,1590.33 ; Q3.2@-912.71,1611.03 -880.38,1590.33 ; Q3.2@-912.71,1611.03 -880.38,1590.33 ; Q3.2@-912.7,1611.02 -880.29,1590.33 ; Q3.2@-912.7,1611.02 -880.29,1590.33 ; Q3.2@-912.7,1611.02 -880.29,1590.33 ; Q3.2@-912.7,1611.02 -880.29,1590.33 ; Q3.2@-912.7,1611.02 -880.29,1590.33 ; Q3.2@-912.7,1611.02 -880.29,1590.33 ; Q3.2@-912.7,1611.02 -880.29,1590.33 ; Q3.2@-912.7,1611.02 -880.29,1590.33 ; Q3.2@-912.7,1611.02 -880.29,1590.33 ; Q3.2@-912.7,1611.02 -880.29,1590.33 ; Q3.2@-912.7,1611.02 -880.29,1590.33 ; Q3.2@-912.7,1611.02 -880.29,1590.33 ; Q3.2@-912.7,1611.02 -880.29,1590.33 ; Q3.2@-912.7,1611.02 -880.29,1590.33 ; Q3.2@-912.7,1611.02 -880.29,1590.33 ; Q3.2@-912.7,1611.02 -880.29,1590.33 ; Q3.2@-912.7,1611.02 -880.29,1590.33 ; Q3.2@-912.7,1611.02 -880.29,1590.33 ; Q3.2@-912.7,1611.02 -880.29,1590.33 ; Q3.2@-912.7,1611.02 -880.29,1590.33 ; Q3.2@-912.69,1611.01 -880.84,1590.84 ; Q3.2@-912.7,1611.02 -880.29,1590.33 ; pad.1@-907.5,1617.5 -880.29,1590.33 ; pad.1@-907.5,1617.5 -880.29,1590.33 ; pad.1@-907.5,1617.5 -880.29,1590.33 ; pad.1@-907.5,1617.5 -880.29,1590.33 ; pad.1@-907.5,1617.5 -880.29,1590.33 ; pad.1@-907.5,1617.5 -880.29,1590.33 ; pad.1@-907.5,1617.5 -880.29,1590.33 ; pad.1@-907.5,1617.5 -880.29,1590.33 ; pad.1@-907.5,1617.5 -880.29,1590.33 ; pad.1@-907.5,1617.5 -880.29,1590.33 ; pad.1@-907.5,1617.5 -880.29,1590.33 ; pad.1@-907.5,1617.5 -880.29,1590.33 ; pad.1@-907.5,1617.5 -880.29,1590.33 ; pad.1@-907.5,1617.5 -880.29,1590.33 ; pad.1@-907.5,1617.5 -880.29,1590.33 ; pad.1@-907.5,1617.5 -880.29,1590.33 ; pad.1@-907.5,1617.5 -880.29,1590.33 ; pad.1@-907.5,1617.5 -880.29,1590.33 ; pad.1@-907.5,1617.5 -880.29,1590.33 ; pad.1@-907.5,1617.5 -880.29,1590.33 ; pad.1@-907.5,1617.5 -880.38,1590.33 ; pad.1@-907.5,1617.5 -880.84,1590.84 ; pad.1@-907.5,1617.5 -880.38,1590.33 ; pad.1@-907.5,1617.5 -880.38,1590.33 ; pad.1@-907.5,1617.5 -880.38,1590.33 ; pad.1@-907.5,1617.5 -880.38,1590.33 ; pad.1@-907.5,1617.5 -880.38,1590.33 ; pad.1@-907.5,1617.5 -880.38,1590.33 ; pad.1@-907.5,1617.5 -880.38,1590.33 ; pad.1@-907.5,1617.5 -880.38,1590.33 ; pad.1@-907.5,1617.5 -880.38,1590.33 ; pad.1@-907.5,1617.5 -880.38,1590.33 ; pad.1@-907.5,1617.5 -880.29,1590.33 ; pad.1@-907.5,1617.5 -880.38,1590.33 ; pad.1@-907.5,1617.5 -880.38,1590.33 ; pad.1@-907.5,1617.5 -880.38,1590.33 ; pad.1@-907.5,1617.5 -880.38,1590.33 ; pad.1@-907.5,1617.5 -880.38,1590.33 ; pad.1@-907.5,1617.5 -880.38,1590.33 ; pad.1@-907.5,1617.5 -880.38,1590.33 ; pad.1@-907.5,1617.5 -880.38,1590.33 ; pad.1@-907.5,1617.5 -880.38,1590.33 ; pad.1@-907.5,1617.5 -880.38,1590.33 ; Q3.2@-907.26,1610.16 -880.17,1590.17 ; Q3.2@-907.26,1610.16 -880.17,1590.17 ; Q3.2@-907.26,1610.16 -880.17,1590.17 ; Q3.2@-907.26,1610.16 -880.17,1590.17 ; Q3.2@-907.26,1610.16 -880.17,1590.17 ; Q3.2@-907.26,1610.16 -880.17,1590.17 ; Q3.2@-907.26,1610.16 -880.17,1590.17 ; Q3.2@-907.26,1610.16 -880.17,1590.17 ; Q3.2@-907.26,1610.16 -880.17,1590.17 ; Q3.2@-907.26,1610.16 -880.17,1590.17 ; Q3.2@-907.26,1610.16 -880.17,1590.17 ; Q3.2@-907.26,1610.16 -880.17,1590.17 ; Q3.2@-907.26,1610.16 -880.17,1590.17 ; Q3.2@-907.26,1610.16 -880.17,1590.17 ; Q3.2@-907.26,1610.16 -880.17,1590.17 ; Q3.2@-907.26,1610.16 -880.17,1590.17 ; Q3.2@-907.26,1610.16 -880.17,1590.17 ; Q3.2@-907.26,1610.16 -880.17,1590.17 ; Q3.2@-907.26,1610.16 -880.17,1590.17 ; Q3.2@-907.26,1610.16 -880.17,1590.17 ; Q3.2@-907.26,1610.16 -880.17,1590.17 ; Q3.2@-901.02,1622.7 -880.38,1590.33 ; Q3.2@-901.01,1622.69 -880.84,1590.84 ; Q3.2@-901.02,1622.7 -880.38,1590.33 ; Q3.2@-901.02,1622.7 -880.38,1590.33 ; Q3.2@-901.02,1622.7 -880.38,1590.33 ; Q3.2@-901.02,1622.7 -880.38,1590.33 ; Q3.2@-901.02,1622.7 -880.38,1590.33 ; Q3.2@-901.02,1622.7 -880.38,1590.33 ; Q3.2@-901.02,1622.7 -880.38,1590.33 ; Q3.2@-901.02,1622.7 -880.38,1590.33 ; Q3.2@-901.02,1622.7 -880.38,1590.33 ; Q3.2@-901.02,1622.7 -880.38,1590.33 ; Q3.2@-901.02,1622.7 -880.38,1590.33 ; Q3.2@-901.02,1622.7 -880.38,1590.33 ; Q3.2@-901.02,1622.7 -880.38,1590.33 ; Q3.2@-901.02,1622.7 -880.38,1590.33 ; Q3.2@-901.02,1622.7 -880.38,1590.33 ; Q3.2@-901.02,1622.7 -880.38,1590.33 ; Q3.2@-901.02,1622.7 -880.38,1590.33 ; Q3.2@-901.02,1622.7 -880.38,1590.33 ; Q3.2@-901.02,1622.7 -880.38,1590.33 ; Q3.2@-901.02,1622.7 -880.38,1590.33 ; Q3.2@-901.03,1622.71 -880.29,1590.33 ; Q3.2@-901.03,1622.71 -880.29,1590.33 ; Q3.2@-901.03,1622.71 -880.29,1590.33 ; Q3.2@-901.03,1622.71 -880.29,1590.33 ; Q3.2@-901.03,1622.71 -880.29,1590.33 ; Q3.2@-901.03,1622.71 -880.29,1590.33 ; Q3.2@-901.03,1622.71 -880.29,1590.33 ; Q3.2@-901.03,1622.71 -880.29,1590.33 ; Q3.2@-901.03,1622.71 -880.29,1590.33 ; Q3.2@-901.03,1622.71 -880.29,1590.33 ; Q3.2@-901.03,1622.71 -880.29,1590.33 ; Q3.2@-901.03,1622.71 -880.29,1590.33 ; Q3.2@-901.03,1622.71 -880.29,1590.33 ; Q3.2@-901.03,1622.71 -880.29,1590.33 ; Q3.2@-901.03,1622.71 -880.29,1590.33 ; Q3.2@-901.03,1622.71 -880.29,1590.33 ; Q3.2@-901.03,1622.71 -880.29,1590.33 ; Q3.2@-901.03,1622.71 -880.29,1590.33 ; Q3.2@-901.03,1622.71 -880.29,1590.33 ; Q3.2@-901.03,1622.71 -880.29,1590.33 ; Q3.2@-901.03,1622.71 -880.29,1590.33 ; Q3.2@-899.96,1617.4 -880.17,1590.17 ; Q3.2@-899.96,1617.4 -880.17,1590.17 ; Q3.2@-899.96,1617.4 -880.17,1590.17 ; Q3.2@-899.96,1617.4 -880.17,1590.17 ; Q3.2@-899.96,1617.4 -880.17,1590.17 ; Q3.2@-899.96,1617.4 -880.17,1590.17 ; Q3.2@-899.96,1617.4 -880.17,1590.17 ; Q3.2@-899.96,1617.4 -880.17,1590.17 ; Q3.2@-899.96,1617.4 -880.17,1590.17 ; Q3.2@-899.96,1617.4 -880.17,1590.17 ; Q3.2@-899.96,1617.4 -880.17,1590.17 ; Q3.2@-899.96,1617.4 -880.17,1590.17 ; Q3.2@-899.96,1617.4 -880.17,1590.17 ; Q3.2@-899.96,1617.4 -880.17,1590.17 ; Q3.2@-899.96,1617.4 -880.17,1590.17 ; Q3.2@-899.96,1617.4 -880.17,1590.17 ; Q3.2@-899.96,1617.4 -880.17,1590.17 ; Q3.2@-899.96,1617.4 -880.17,1590.17 ; Q3.2@-899.96,1617.4 -880.17,1590.17 ; Q3.2@-899.96,1617.4 -880.17,1590.17 ; Q3.2@-899.96,1617.4 -880.17,1590.17 ; Q3.2@-896.68,1617.4 ccw(c-870.8,1617.4) -889.1,1599.1 ; Q3.2@-896.68,1617.4 ccw(c-870.8,1617.4) -889.1,1599.1 ; Q3.2@-896.68,1617.4 ccw(c-870.8,1617.4) -889.1,1599.1 ; Q3.2@-890.82,1622.1 -880.17,1590.17 ; Q3.2@-890.82,1622.1 -880.17,1590.17 ; Q3.2@-890.82,1622.1 -880.17,1590.17 ; Q3.2@-890.82,1622.1 -880.17,1590.17 ; Q3.2@-890.82,1622.1 -880.17,1590.17 ; Q3.2@-890.82,1622.1 -880.17,1590.17 ; Q3.2@-890.82,1622.1 -880.17,1590.17 ; Q3.2@-890.82,1622.1 -880.17,1590.17 ; Q3.2@-890.82,1622.1 -880.17,1590.17 ; Q3.2@-890.82,1622.1 -880.17,1590.17 ; Q3.2@-890.82,1622.1 -880.17,1590.17 ; Q3.2@-890.82,1622.1 -880.17,1590.17 ; Q3.2@-890.82,1622.1 -880.17,1590.17 ; Q3.2@-890.82,1622.1 -880.17,1590.17 ; Q3.2@-890.82,1622.1 -880.17,1590.17 ; Q3.2@-890.82,1622.1 -880.17,1590.17 ; Q3.2@-890.82,1622.1 -880.17,1590.17 ; Q3.2@-890.82,1622.1 -880.17,1590.17 ; Q3.2@-890.82,1622.1 -880.17,1590.17 ; Q3.2@-890.82,1622.1 -880.17,1590.17 ; Q3.2@-890.82,1622.1 -880.17,1590.17 ; Q3.2@-889.68,1617.4 ccw(c-846.9,1617.4) -877.15,1587.15 ; Q3.2@-889.68,1617.4 ccw(c-846.9,1617.4) -877.15,1587.15 ; Q3.2@-889.68,1617.4 ccw(c-846.9,1617.4) -877.15,1587.15
  Bottom Layer w7: pad.1@-912.69,1611.01 -880.84,1590.84 pad.1@-901.01,1622.69 ; pad.1@-907.5,1609.19 cw(c-907.5,1589.12) -893.31,1603.31 cw(c-879.12,1617.5) pad.1@-899.19,1617.5 ; pad.1@-907.5,1617.5 -840,1550 -840,1515 -835,1510 -770,1510 -729.69,1550.31 R37.1@-729.69,1560 ; -761.11,1518.89 ccw(c-801.25,1559.02) R37.1@-744.49,1559.02 ; -749.17,1530.83 ccw(c-777.35,1559.02) R37.1@-737.49,1559.02 ; R37.1@-742.76,1565.97 -757.46,1522.54 ; -740.11,1539.89 cw(c-729.69,1529.47) R37.1@-729.69,1544.21 ; R37.1@-736.28,1563.2 -757.46,1522.54 ; R37.1@-729.69,1559.02 -757.46,1522.54 ; R37.1@-723.9,1553.77 -757.46,1522.54 ; R37.1@-719.51,1548.26 -757.46,1522.54
RX2: R28.1 U3.22 | length 583.9
  Bottom Layer w6: R28.1@-1152.17,3397.09 -1097.48,3397.09 -1016.38,3315.98 U3.22@-935.94,3315.98 ; R28.1@-1152.01,3393.78 -1115.86,3397.09 ; R28.1@-1152.01,3400.39 -1115.86,3397.09 ; R28.1@-1150.97,3387.86 -1115.86,3397.09 ; R28.1@-1150.97,3406.32 -1115.86,3397.09 ; R28.1@-1148.94,3382.12 -1115.86,3397.09 ; R28.1@-1148.94,3412.05 -1115.86,3397.09 ; R28.1@-1145.58,3390.51 cw(c-1129.7,3374.62) -1129.7,3397.09 cw(c-1129.7,3419.56) R28.1@-1145.58,3403.67 ; R28.1@-1141.34,3386.26 cw(c-1115.21,3360.13) -1115.21,3397.09 cw(c-1115.21,3434.04) R28.1@-1141.34,3407.91 ; -984.46,3315.98 U3.22@-961.53,3315.98